# Altium PCB TIDA050024.PcbDoc (part 3 of 3)
Units mil, origin at the board's own origin, x right, y up, seen from the top; angles counter-clockwise.
Board outline 5500.19 x 3301.39 mil, 4 copper layers (Top Layer, Signal Layer 1, Signal Layer 2, Bottom Layer), stack 46.8 mil thick; 150 components, 88 nets, 368 pads, 374 vias.
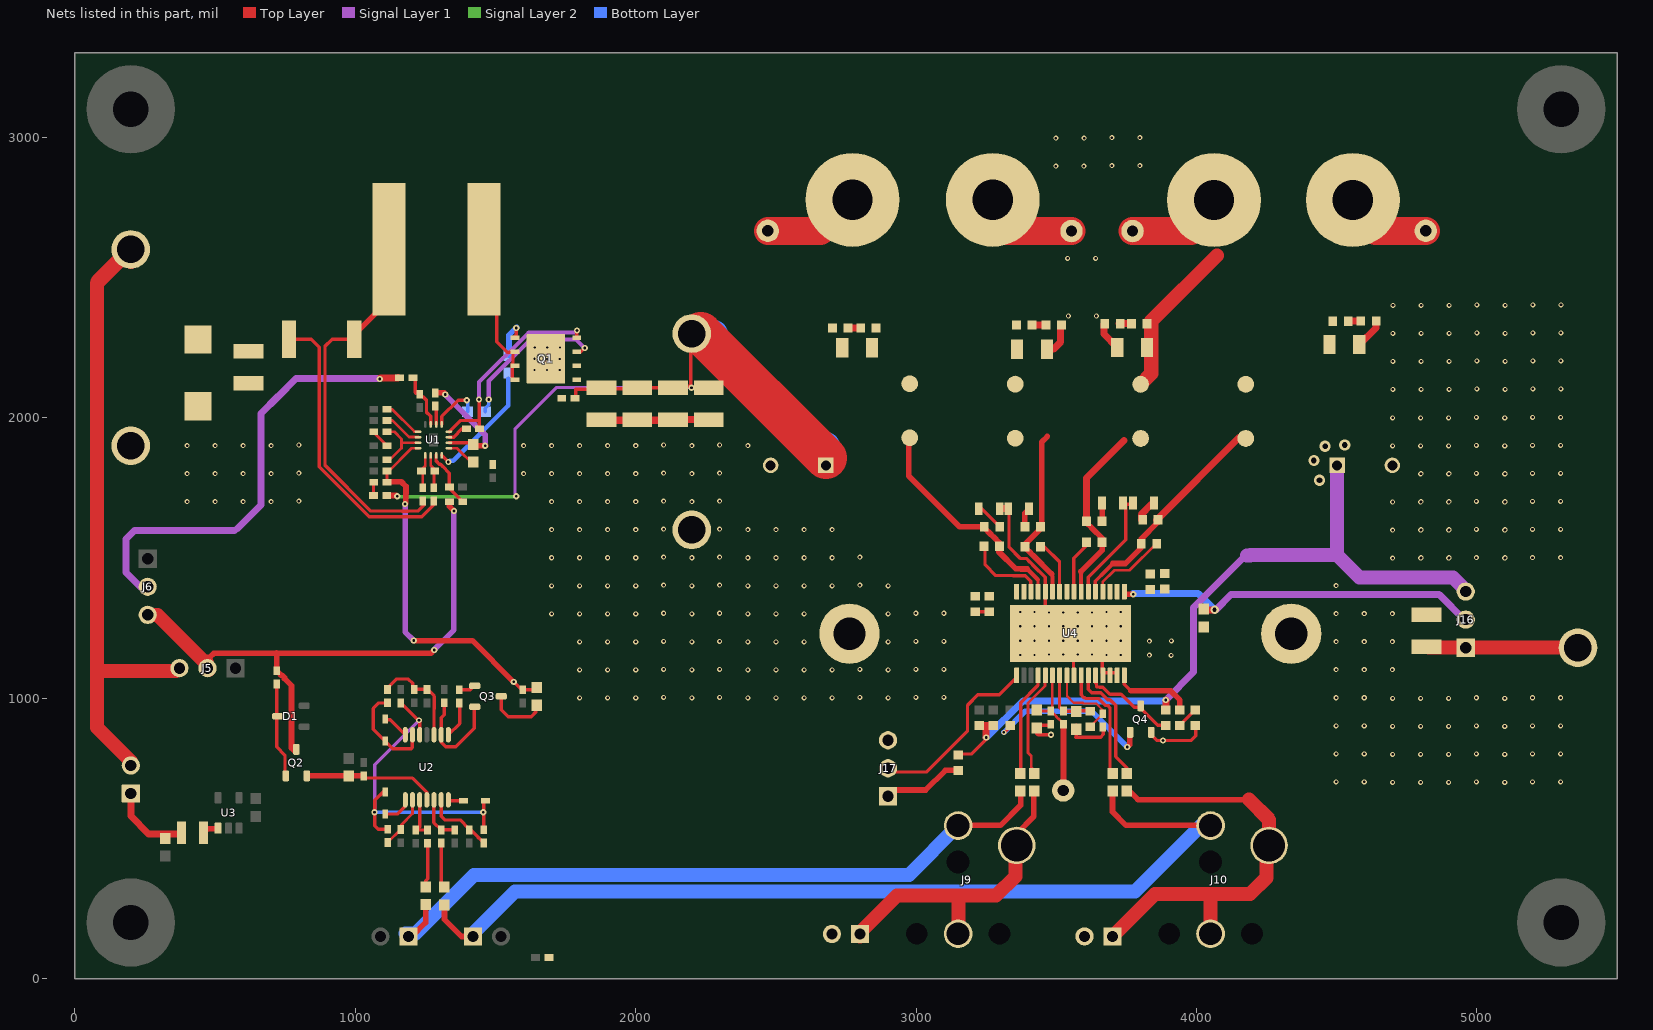
[diagram p4: the nets of this part, all layers, seen from the top]

## Via types
v1: diameter 18, hole 9, Top Layer to Bottom Layer, 291 vias
v2: diameter 22, hole 10, Top Layer to Bottom Layer, 26 vias
v3: diameter 19.68, hole 7.87, Top Layer to Bottom Layer, 18 vias
v4: diameter 19.68, hole 7.87, Top Layer to Bottom Layer, tented both sides, 16 vias
v5: diameter 18, hole 8, Top Layer to Bottom Layer, 9 vias
v6: diameter 40, hole 20, Top Layer to Bottom Layer, 6 vias
v7: diameter 24, hole 12, Top Layer to Bottom Layer, 5 vias
v8: diameter 20, hole 10, Top Layer to Bottom Layer, 2 vias
v9: diameter 30, hole 15, Top Layer to Bottom Layer, 1 vias

## Nets (pads, with @x,y where several pads share a name; then routed paths per layer and width w, separated by ;. In a path a pad name is that pad's centre, name@x,y a point inside that pad or via, vN(x,y) a via of type N, cw(c..) or ccw(c..) an arc to the next point about the centre after c; other vN are vias at no path point) (continued)
AVCC: C27.1 J16.2 U4.17 | length 1342
  Top Layer w20: U4.17@3746.46,1370.11 3746.7,1370.35 v2(3774.52,1370.35)
  Top Layer w25: C27.1@4025.43,1313.59 4062.18,1313.59 4063.67,1315.08 v9@4064.57,1315.08
  Signal Layer 1 w25: v9(4064.43,1315.4) 4069.82,1315.4 4123.57,1369.15 4865.36,1369.15 4955.66,1278.85 J16.2@4963.85,1278.85
  Bottom Layer w25: v2@3774.13,1372.62 3775.37,1373.87 4005.96,1373.87 v9(4064.43,1315.4)
AVCC-IN: C25.1 J15.1 J16.1 | length 531.2
  Top Layer w50: C25.1@4828.07,1180.56 4831.5,1180.56 4832.07,1181.13 4833.2,1180 4970,1180 5351.06,1180 J15.1@5356.39,1185.33
Boot: C16.2 U1.11 | length 62.6
  Top Layer w12: U1.11@1334.28,1930.68 1350.96,1930.68 1380.7,1960.41 C16.2@1384.6,1960.41
COMP: C14.1 R7.2 U1.3 | length 217.5
  Top Layer w10: R7.2@1113.62,1950 1139.75,1950 1165.22,1924.53 1165.22,1911.38 ; C14.1@1120.92,1847.68 1121.19,1847.41 1165.22,1891.44 1165.22,1911.38 ; 1164.75,1911.85 1165.22,1911.38 ; U1.3@1224.04,1911 1165.6,1911 1165.22,1911.38
EN: J6.2 R6.2 | length 1601.5
  Top Layer w25: v2@1089.64,2141.5 1151.98,2141.5 R6.2@1153.44,2142.96
  Signal Layer 1 w25: J6.2@260.09,1397.08 234.18,1397.08 182.73,1448.53 182.73,1567.98 213.05,1598.3 570.48,1598.3 ; 580.33,1604.48 664.53,1688.68 664.53,2015.47 725.79,2076.72 726.36,2076.72 789.26,2139.63 v2@1085.86,2139.63
  other v2: 1087.27,2137.98
EN1: C12.1 R6.1 U1.15 | length 197.2
  Top Layer w12: R6.1@1213.97,2141.18 1213.97,2089.89 1216.54,2087.32 ; 1215.43,2089.25 1226.78,2089.25 1254.24,2061.78 1254.24,2019.88 1269.32,2004.81 U1.15@1269.32,1975.96
FB: C23.1 R2.1 R3.2 R26.2 U1.4 | length 1330.1
  Top Layer w10: R2.1@1113.62,1770 1113.62,1803.53 1201.35,1891.25 U1.4@1226,1891.25
  Top Layer w12: v2(1565.08,1058.19) C23.1@1593.41,1029.87 ; C23.1@1593.42,1029.88 R26.2@1646.87,1029.88
  Top Layer w20: R2.1@1114.7,1771.76 1164.41,1771.76 1181.04,1755.13 1181.04,1731.3 1180.91,1731.17 1180.91,1694.81 v2(1177.92,1691.82) ; v2(1208.81,1205.26) 1418.01,1205.26 v2(1565.08,1058.19)
  Signal Layer 1 w20: v2(1177.92,1691.82) 1177.92,1236.14 v2(1208.81,1205.26)
GND: C1.2 C2.2 C5.2 C6.2 C7.2 C8.2 C9.2 C17.2 C25.2 C27.2 C29.1 C30.1 C32.2 C39.2 C42.1 C43.1 C44.2 C46.2 C51.2 C53.2 C54.2 C55.1 C56.1 H1.1@4337.4,1230 H1.2 J2.1 J4.1 J17.3 JP1.2 JP2.2 Q1.9 Q4.2 R27.1@3480.57,906.95 R28.1 R33.1 R34.1 R35.1 R36.1 R39.1 R40.1 R41.1 R42.1 Rg1.2 Rg2.2 U1.9 U4.9 U4.13 U4.14 U4.15 U4.22 U4.25 U4.28 U4.33@3550.57,1230.57 | length 2518.7
  Top Layer w10: U1.9@1334.28,1891.31 1363.22,1891.31 C17.2@1425.03,1829.5
  Top Layer w12: J2.1@200,1950 J2.1@239.31,1950 ; C7.2@2000.71,1990.96 C7.2@2000.71,1998.84 ; C55.1@3210.57,1308.01 3259.88,1308.01 C56.1@3260.66,1308.79 ; R34.1@3314.8,1677.27 3331.52,1677.27 3331.52,1537.28 3370.58,1498.23 3392.56,1498.23 3406.22,1484.57 3406.35,1484.57 3420.41,1470.51 3420.41,1470.38 3460.18,1430.61 U4.28@3460.18,1389.88 ; U4.33@3460.16,1329.86 U4.28@3460.16,1386.09 ; R27.1@3479.4,903.4 3479.01,903.01 3430.57,903.01 3430.57,873.67 3434.63,869.61 v2(3480.67,869.61) ; U4.33@3481.22,1308.79 3482.72,1308.79 U4.33@3483.49,1309.56 ; U4.33@3536.23,1300.8 U4.33@3536.95,1301.52 ; U4.33@3561.5,1142.57 3561.5,1090.71 U4.9@3563.88,1088.33 ; 3569.63,860.55 3569.95,860.87 ; C43.1@3570.57,903.01 3570.57,861.48 3569.95,860.87 ; U4.22@3616.95,1362.32 3613.72,1362.32 3613.72,1431.43 3747.04,1564.75 R35.1@3747.04,1691.44 ; U4.33@3664.41,1144.48 3664.41,1091.16 3663.9,1090.66 U4.15@3716.08,1090.66 ; R28.1@3667.92,905.02 3667.92,870.86 3657.93,860.87 3569.95,860.87 ; R35.1@3729.76,1692.08 3761.32,1692.08 R36.1@3763.24,1694 ; Q4.2@3838.19,880.03 3838.19,874.94 3835.22,871.97 3857.99,849.2 v2(3880.17,849.2) ; v2(3880.17,849.2) 3980.83,849.24 3996.8,865.21 C46.2@3996.8,900.6 ; C27.2@4021.45,1260.32 C27.2@4024,1257.77
  Top Layer w25: C6.2@1872.99,1988.19 1875.76,1990.96 2000.71,1990.96 2122.16,1990.96 2126.31,1995.11 2128.33,1993.09 C9.2@2260.76,1993.09 ; R33.1@3298.17,1675.9 3298.49,1675.57 R34.1@3328.17,1675.57 ; C32.2@3466.58,2244.29 3489.62,2244.29 3515.78,2270.46 R40.1@3515.78,2327.98 ; R41.1@3673.15,2337.81 3669.93,2334.59 3669.93,2297.86 3717.21,2250.57 C39.2@3717.42,2250.57 ; C44.2@4580.3,2260.95 4639.42,2320.07 R42.1@4639.42,2345.02
  other v1: 4698.97,699.5 4798.97,699.5 4898.97,699.5 5098.97,699.5 4497.99,701.49 4597.99,701.49 4997.99,701.49 5197.99,701.49 5297.99,701.49 4698.97,799.5 4798.97,799.5 4898.97,799.5 5098.97,799.5 4497.99,801.49 4597.99,801.49 4997.99,801.49 5197.99,801.49 5297.99,801.49 4698.97,899.5 4798.97,899.5 4898.97,899.5 5098.97,899.5 4497.99,901.49 4597.99,901.49 4997.99,901.49 5197.99,901.49 5297.99,901.49 4698.97,999.5 4798.97,999.5 4898.97,999.5 5098.97,999.5 1800.45,1000.73 1900.45,1000.73 2000.45,1000.73 2200.45,1000.73 2400.45,1000.73 2500.45,1000.73 2600.45,1000.73 2700.45,1000.73 2900.45,1000.73 4497.99,1001.49 4597.99,1001.49 4997.99,1001.49 5197.99,1001.49 5297.99,1001.49 2099.47,1002.72 2299.47,1002.72 2799.47,1002.72 2999.47,1002.72 3099.47,1002.72 1800.45,1100.73 1900.45,1100.73 2000.45,1100.73 2200.45,1100.73 2400.45,1100.73 2500.45,1100.73 2600.45,1100.73 2700.45,1100.73 2900.45,1100.73 4497.99,1101.49 4597.99,1101.49 4697.99,1101.49 2099.47,1102.72 2299.47,1102.72 2799.47,1102.72 2999.47,1102.72 3099.47,1102.72 3832.05,1153.49 3909.58,1152.56 1800.45,1200.73 1900.45,1200.73 2000.45,1200.73 2200.45,1200.73 2400.45,1200.73 2500.45,1200.73 2600.45,1200.73 2900.45,1200.73 4497.99,1201.49 4597.99,1201.49 4697.99,1201.49 2099.47,1202.72 2299.47,1202.72 2999.47,1202.72 3099.47,1202.72 3831.95,1203.31 3910.53,1204.48 1700.45,1300.73 1800.45,1300.73 1900.45,1300.73 2000.45,1300.73 2200.45,1300.73 2400.45,1300.73 2500.45,1300.73 2600.45,1300.73 2900.45,1300.73 4497.99,1301.49 4597.99,1301.49 4697.99,1301.49 2099.47,1302.72 2299.47,1302.72 2999.47,1302.72 3099.47,1302.72 1700.45,1400.73 1800.45,1400.73 1900.45,1400.73 2000.45,1400.73 2200.45,1400.73 2400.45,1400.73 2500.45,1400.73 2600.45,1400.73 2700.45,1400.73 2900.45,1400.73 4497.99,1401.49 2099.47,1402.72 2299.47,1402.72 2799.47,1402.72 4698.97,1499.5 4798.97,1499.5 4898.97,1499.5 5098.97,1499.5 1700.45,1500.73 1800.45,1500.73 1900.45,1500.73 2000.45,1500.73 2200.45,1500.73 2400.45,1500.73 2500.45,1500.73 2600.45,1500.73 2700.45,1500.73 4800.45,1500.73 4900.45,1500.73 4997.99,1501.49 5100.45,1500.73 5197.99,1501.49 5297.99,1501.49 2099.47,1502.72 2299.47,1502.72 2799.47,1502.72 4698.97,1599.5 4798.97,1599.5 4898.97,1599.5 5098.97,1599.5 1700.45,1600.73 1800.45,1600.73 1900.45,1600.73 2000.45,1600.73 2400.45,1600.73 2500.45,1600.73 2600.45,1600.73 2700.45,1600.73 4800.57,1600.57 4900.57,1600.57 4997.99,1601.49 5100.57,1600.57 5197.99,1601.49 5297.99,1601.49 2099.47,1602.72 2299.47,1602.72 4698.97,1699.5 4798.97,1699.5 4898.97,1699.5 5098.97,1699.5 400.45,1700.73 500.45,1700.73 600.45,1700.73 700.45,1700.73 1700.45,1700.73 1800.45,1700.73 1900.45,1700.73 2000.45,1700.73 2200.45,1700.73 4800.45,1700.73 4900.45,1700.73 4997.99,1701.49 5100.45,1700.73 5197.99,1701.49 5297.99,1701.49 799.47,1702.72 2099.47,1702.72 2299.47,1702.72 4798.97,1799.5 4898.97,1799.5 5098.97,1799.5 400.45,1800.73 500.45,1800.73 600.45,1800.73 700.45,1800.73 1600.45,1800.73 1700.45,1800.73 1800.45,1800.73 1900.45,1800.73 2000.45,1800.73 2200.45,1800.73 4800.57,1800.57 4900.57,1800.57 4997.99,1801.49 5100.57,1800.57 5197.99,1801.49 5297.99,1801.49 799.47,1802.72 2099.47,1802.72 2299.47,1802.72 4698.97,1899.5 4798.97,1899.5 4898.97,1899.5 5098.97,1899.5 400.45,1900.73 500.45,1900.73 600.45,1900.73 700.45,1900.73 1600.45,1900.73 1700.45,1900.73 1800.45,1900.73 1900.45,1900.73 2000.45,1900.73 2200.45,1900.73 2400.45,1900.73 4997.99,1901.49 5197.99,1901.49 5297.99,1901.49 799.47,1902.72 2099.47,1902.72 2299.47,1902.72 4699.09,1999.34 4799.09,1999.34 4899.09,1999.34 5099.09,1999.34 4998.1,2001.33 5198.1,2001.33 5298.1,2001.33 4700.45,2100.73 4800.45,2100.73 4900.45,2100.73 5100.45,2100.73 4999.47,2102.72 5199.47,2102.72 5299.47,2102.72 4700.45,2200.73 4800.45,2200.73 4900.45,2200.73 5100.45,2200.73 4999.47,2202.72 5199.47,2202.72 5299.47,2202.72 4700.45,2300.73 4800.45,2300.73 4900.45,2300.73 5100.45,2300.73 4999.47,2302.72 5199.47,2302.72 5299.47,2302.72 3542.99,2362.72 3642.99,2362.72 4700.57,2400.57 4800.57,2400.57 4900.57,2400.57 5100.57,2400.57 4999.58,2402.56 5199.58,2402.56 5299.58,2402.56 3539.98,2568.29 3639.98,2568.29 3498.67,2897.45 3598.67,2897.45 3698.09,2899.06 3798.09,2899.06 3498.79,2997.3 3598.79,2997.3 3698.21,2998.9 3798.21,2998.9
  other v3: 3473.8,1155.77 3524.98,1155.77 3576.16,1155.77 3627.34,1155.77 3473.8,1204.98 3524.98,1204.98 3576.16,1204.98 3627.34,1204.98 3473.8,1256.16 3524.98,1256.16 3576.16,1256.16 3627.34,1256.16 3473.8,1305.37 3524.98,1305.37 3576.16,1305.37 3627.34,1305.37
  other v4: 3371.44,1153.8 3422.62,1153.8 3678.52,1153.8 3729.71,1153.8 3371.44,1204.98 3422.62,1204.98 3678.52,1204.98 3729.71,1204.98 3371.44,1256.16 3422.62,1256.16 3678.52,1256.16 3729.71,1256.16 3371.44,1307.34 3422.62,1307.34 3678.52,1307.34 3729.71,1307.34
  other v5: 1639.25,2170.19 1684.3,2169.73 1729.3,2169.73 1639.25,2210.19 1684.3,2209.73 1729.3,2209.73 1684.96,2250.16 1729.96,2250.16 1639.91,2250.62
GVDD: C43.2 R43.2 R44.1 U4.7 | length 236.8
  Top Layer w12: U4.7@3511.36,1090.66 3511.36,967.28 3525.23,953.4 3570.03,953.4 3572.28,955.65 R44.1@3618.04,955.65
HDRV: R11.1 U1.13 | length 195.3
  Top Layer w12: U1.13@1308.69,1975.96 1308.69,2004.49 1365.54,2061.34 1376.63,2061.34 ; 1367.02,2062.08 1370.35,2062.08 1370.72,2062.45 v2(1398.07,2062.45)
  Bottom Layer w12: v2@1397.94,2063.83 1400.87,2060.9 R11.1@1400.87,2021.02
HDRV1: Q1.3 R11.2 | length 560.2
  Top Layer w12: Q1.3@1790.04,2235 1804.57,2235 1818.06,2248.49 1818.06,2248.69 v2@1817.68,2249.08
  Signal Layer 1 w12: 1810.08,2256.03 1811.72,2256.03 1811.72,2253.98 v2@1810.49,2252.75
  Signal Layer 1 w15: v2(1476.07,2064.49) 1476.07,2130.41 1625.05,2279.38 1786.72,2279.38 1810.08,2256.03
  Bottom Layer w12: R11.2@1463.86,2021.02 1463.86,2032.96 1476.72,2045.82 v2@1476.72,2064.07 ; v2@1476.21,2064.58 v2@1476.21,2065.34
  other v2: 1818.25,2248.5
ISNS+: C10.2 R01.1 U1.6 | length 125.3
  Top Layer w10: U1.6@1269.32,1865.72 1269.52,1865.52 1269.52,1830.01 1286.72,1812.81 1280.56,1806.65 R01.1@1280.56,1750.22
ISNS-: C10.1 R02.1 U1.5 | length 117.9
  Top Layer w10: C10.1@1233.89,1814.22 1235.56,1814.22 1249.63,1828.29 U1.5@1249.63,1865.72 ; R02.1@1240.56,1750.22 1240.56,1805.72 C10.1@1242.94,1808.1
LDRV: R10.1 U1.8 | length 426
  Top Layer w12: U1.8@1308.69,1865.72 v2(1332.15,1842.26)
  Bottom Layer w12: v2(1332.15,1842.26) v2@1336.83,1846.95
  Bottom Layer w16: v2@1336.83,1846.95 1349.18,1846.95 1545.59,2043.36 1545.59,2139.47
LDRV1: Q1.5 R10.2 | length 149.2
  Top Layer w12: Q1.5@1566.26,2287.66 1574.77,2296.17 v2@1574.77,2321.63
  Bottom Layer w12: v2@1574.27,2318.94 v2(1574.27,2320.37)
  Bottom Layer w20: R10.2@1548.42,2222.91 1548.42,2294.52 v2@1575.81,2321.9
LIN: C21.1 C38.1 J8.1 J10.3 | length 3442.1
  Top Layer w20: C21.1@1318.41,261.7 1318.41,211.28 1379.68,150 J8.1@1420,150 J8.1@1410.01,159.99 ; C38.1@3700.49,668.52 3700.49,594.85 3748.94,546.4 J10.3@4050.57,546.4
  Bottom Layer w25: J8.1@1411.17,151.17 J8.1@1414.32,148.02
  Bottom Layer w50: J8.1@1411.17,151.17 1570,310 3780,310 4015.83,545.83 J10.3@4050,545.83
LINN: C41.2 U4.11 | length 431.7
  Top Layer w12: U4.11@3614.55,1080.97 3614.55,1030.95 3626.62,1018.88 3658.01,1018.88 3682.95,993.94 3691.47,993.94 3711.38,974.03 3711.38,934.11 3711.49,934 3711.49,791.8 3751.83,751.45 3748.25,747.87 C41.2@3748.25,731
LINP: C38.2 U4.10 | length 430.8
  Top Layer w12: U4.10@3588.96,1080.97 3588.96,1011.49 3598.7,1001.75 3601.7,1001.75 3604.57,998.88 3649.73,998.88 3674.67,973.94 3683.18,973.94 3691.38,965.74 3691.38,909.07 3691.49,908.96 C38.2@3691.49,725.88
MODSEL: J17.2 U4.1 | length 680
  Top Layer w12: J17.2@2900,750 2913.44,736.56 3036.8,736.56 3183.56,883.33 3183.56,975.73 ; 3183.65,975.64 3220.34,1012.34 3297.05,1012.34 3357.95,1073.24 3357.49,1073.7 U4.1@3357.49,1096.02
MUTE: Q4.3 R30.2 U4.12 | length 355.4
  Top Layer w12: U4.12@3640.14,1080.97 3640.14,1053.41 3643.37,1050.17 3643.37,1039.91 3653.64,1039.91 3654.67,1038.88 3666.3,1038.88 3691.24,1013.94 3730.91,1013.94 3777.6,967.26 Q4.3@3800.42,967.26 ; Q4.3@3800.42,970.84 Q4.3@3800.42,967.26 ; R30.2@3890.57,901.29 R30.2@3894,901.29 ; R30.2@3890.57,903.01 3861.12,903.01 3852.12,912.01 3852.07,912.01 3800.42,963.67 Q4.3@3800.42,967.26
NetC11_1: C11.1 R5.1 U1.7 | length 261.4
  Top Layer w10: U1.7@1288.7,1867.06 1288.7,1847.24 1302.13,1833.81 1303.13,1832.81 1303.93,1832.81 1310.37,1826.37
  Top Layer w12: U1.7@1288.11,1867.43 1288.11,1845.93 1300.23,1833.81 1302.13,1833.81 1304.34,1833.81 1311.37,1826.78 1311.37,1826.47 1335.72,1802.12 C11.1@1335.72,1752.85 ; C11.1@1335.94,1754.83 1335.94,1747.69 R5.1@1383.62,1700
NetC13_1: C13.1 R7.1 | length 70.2
  Top Layer w10: R7.1@1066.51,1949.49 1067.83,1948.17 1069.81,1948.17 1069.81,1943.81 C13.1@1113.62,1900
NetC15_1: C15.1 U1.2 | length 136.8
  Top Layer w10: C15.1@1113.62,1990 1132.52,1990 1191.47,1931.05 1224.65,1931.05 1225.37,1930.32 U1.2@1225.62,1930.57
NetC20_2: C20.2 R13.2 | length 161.4
  Top Layer w12: C20.2@1251.93,326.52 1251.93,348.52 1258.99,355.59 1258.99,484.51 R13.2@1259.3,484.82
NetC21_2: C21.2 R19.2 | length 160.5
  Top Layer w12: R19.2@1305.43,481.76 1305.43,481.15 1306.35,480.24 1306.35,337.11 C21.2@1317.29,326.17
NetC22_1: C22.1 R23.2 R24.2 U2.10 | length 359.8
  Top Layer w12: R23.2@1114.15,1034.64 1114.15,1035.59 1146.67,1068.11 1190.03,1068.11 1204.69,1053.45 1204.69,1031.13 1205.65,1032.09 1257.93,1032.09 1281.08,1008.94 1281.08,1006.39 1281.93,1005.54 1281.93,961.6 1281.08,960.75 U2.10@1281.08,869.61
NetC31_1: C31.1 J9.1 J9.4 JP1.1 | length 1121.1
  Top Layer w20: J9.4@3359.23,475.53 3359.23,517.63 3419.49,577.89 C31.1@3419.49,669.85
  Top Layer w50: JP1.1@2800.57,150.57 2800.57,164.61 2931.53,295.57 3285.07,295.57 3353.89,364.4 J9.4@3353.89,479.69 ; 3146.53,295.33 3150.57,291.29 J9.1@3150.57,160.57
NetC33_2: C33.2 R40.2 | length 47.8
  Top Layer w25: C33.2@3413.13,2330.57 3460.85,2330.57 R40.2@3460.92,2330.64
NetC34_2: C34.2 U4.26 | length 187
  Top Layer w12: C34.2@3443.13,1540.57 3456.95,1540.57 3511.36,1486.16 U4.26@3511.36,1389.88
NetC35_2: C35.2 U4.30 | length 281.5
  Top Layer w12: C35.2@3245.86,1542.3 3245.86,1475.55 3284.14,1437.27 3345.37,1437.27 3345.65,1436.99 3365.21,1436.99 3365.63,1436.57 3389.86,1436.57 3409,1417.44 U4.30@3409,1389.88
NetC36_2: C36.2 U4.24 | length 185.8
  Top Layer w12: U4.24@3562.54,1389.88 3562.54,1459.24 3562.37,1459.4 3562.37,1499.53 3605.21,1542.36 C36.2@3605.21,1557.89
NetC37_2: C37.2 U4.20 | length 274.1
  Top Layer w10: U4.20@3665.36,1389.48 3665.36,1413.65 3707.89,1456.18 3761.19,1456.18 3762.7,1457.69 3762.97,1457.69 3857.15,1551.87 C37.2@3857.15,1552.76
NetC40_2: C40.2 R41.2 | length 49.5
  Top Layer w25: R41.2@3727.93,2336.52 3723.42,2336.52 3724.37,2335.57 R41.2@3728.13,2335.57 C40.2@3768.01,2335.57
NetC41_1: C41.1 J10.1 J10.4 JP2.1 | length 1538.2
  Top Layer w20: C41.1@3755.91,673.42 3791.13,638.2 4187.38,638.2
  Top Layer w50: JP2.1@3700.57,150.57 3851.2,301.2 4190.98,301.2 4249.39,359.61 J10.4@4249.39,488.22 ; J10.1@4050.57,160.57 4050.57,293.35 4052.63,295.41 ; 4187.38,638.2 4259.23,566.35 J10.4@4259.23,475.53
NetC45_2: C45.2 R42.2 | length 44.2
  Top Layer w25: C45.2@4541.03,2344.34 4584.26,2344.34 R42.2@4584.93,2345.02
NetC46_1: C46.1 R29.1 | length 76.3
  Top Layer w12: R29.1@3942.14,903.96 3942.14,904.7 C46.1@3995.57,958.13
NetC47_1: C47.1 R33.2 | length 102.7
  Top Layer w12: R33.2@3223.66,1678.7 3230.01,1678.7 C47.1@3298.13,1610.57
NetC48_1: C48.1 R34.2 | length 71
  Top Layer w20: C48.1@3388.01,1610.57 3388.01,1659.51 R34.2@3403.61,1675.1
NetC49_1: C49.1 R35.2 | length 66.1
  Top Layer w20: R35.2@3660.02,1695.43 3663.13,1692.31 C49.1@3663.13,1630.57
NetC50_1: C50.1 R36.2 | length 68.8
  Top Layer w25: C50.1@3803.01,1635.57 3803.01,1655.16 R36.2@3837.83,1689.97
NetC52_2: C52.2 R39.2 | length 46.7
  Top Layer w25: R39.2@2757.56,2320 2802.13,2320 2803.32,2321.19 2803.12,2321.39 C52.2@2803.12,2321.59
NetD1_3: D1.3 Q2.1 R17.1 | length 348.7
  Top Layer w12: R17.1@720.03,1050.4 720.03,937.84 720.39,937.48 720.39,826.16 749.47,797.07 Q2.1@749.47,713.87
NetD2_1: D2.1 D4.1 R16.2 R18.2 R22.2 U2.12 | length 1208.3
  Top Layer w12: D2.1@1104.49,670.14 1069.77,635.42 1069.77,544.38 1081.81,532.34 R16.2@1115.71,532.34 ; R18.2@1162.44,983.15 v8@1226.16,919.43 ; U2.12@1230.24,869.33 v8@1230.24,915.35 ; v2(1456.37,593.34) v2@1458.79,590.91 ; R22.2@1459.04,531.05 v2@1459.04,590.91 ; v2@1459.04,593.34 1459.04,630.34 D4.1@1462.99,634.29
  Signal Layer 1 w12: v2(1069.32,593.34) 1069.32,761.99 v8@1226.53,919.2
  Bottom Layer w12: v2@1072.12,593.34 v2(1456.37,593.34)
  other v8: 1227.66,920.94
NetD2_2: D2.2 U2.1 | length 108.4
  Top Layer w12: D2.2@1106.87,586.89 1150.42,586.89 1178.78,615.25 1178.78,638.97 1179.31,638.44 U2.1@1179.31,638.18
NetD3_1: D3.1 R23.1 U2.13 | length 348
  Top Layer w12: R23.1@1113.43,982.94 1084.44,982.94 1064.74,963.23 1064.74,889.02 D3.1@1106.87,846.89 1134,819.76 1199.27,819.76 1203.42,823.9 U2.13@1203.42,871.73
NetD3_2: D3.2 U2.14 | length 96
  Top Layer w12: D3.2@1104.95,923.21 1125.12,923.21 U2.14@1178.72,869.61
NetD4_2: D4.2 U2.7 | length 58.2
  Top Layer w12: U2.7@1331.99,634.58 1332.26,634.86 U2.7@1332.26,637.33 1335.77,633.82 D4.2@1386.12,633.82
NetJ17_1: J17.1 R38.1 | length 281.6
  Top Layer w20: J17.1@2900,650 2922.49,672.49 3034.18,672.49 3104.33,742.64 R38.1@3143.23,742.64
NetL1_1: L1.1 R0.2 R02.2 | length 1342.4
  Top Layer w12: R0.2@981.14,2280 917.69,2280 892.31,2254.62 892.31,1830 1055.14,1667.17 1167.22,1667.17 1167.57,1666.82 1188.28,1666.82 1188.63,1667.17 1223.63,1667.17 1246.22,1689.77 1246.22,1692.61 R02.2@1239.46,1699.37
  Top Layer w20: R0.2@981.14,2280 1118.96,2417.81 L1.1@1118.96,2597.97
NetL2_2: L2.2 U3.1 | length 56.6
  Top Layer w20: L2.2@459.37,520 473.12,533.75 U3.1@510.32,533.75
NetQ3_1: Q3.1 R27.1@1371.04,1030.14 | length 58.4
  Top Layer w12: R27.1@1371.04,1030.14 1409.97,1030.14 Q3.1@1423.7,1043.87
NetQ3_2: Q3.2 R25.2 U2.9 | length 382.7
  Top Layer w12: U2.9@1306.67,869.61 1306.67,930.62 1317.22,941.17 R25.2@1317.22,980.21 ; U2.9@1306.71,867.14 1306.71,842.6 1322.09,827.22 1358.43,827.22 1371.11,839.9 1371.46,839.9 1424.48,892.92 Q3.2@1424.48,967.27 ; U2.9@1307.37,845.22 U2.9@1307.37,862.72
NetQ3_3: Q3.3 R26.1 | length 221.3
  Top Layer w12: Q3.3@1520.79,1006.62 1520.79,958.61 1545.46,933.94 1627.17,933.94 1644.7,951.47 R26.1@1644.7,983.38
NetQ4_1: Q4.1 R37.2 | length 619.8
  Top Layer w12: v1@3312.77,876.48 3314.04,876.48 R37.2@3340.57,903.01
  Top Layer w20: v2(3753.07,825.8) 3761.24,833.96 Q4.1@3761.24,879.17
  Bottom Layer w20: v1(3313.33,877.83) 3389.32,953.81 3625.06,953.81 v2(3753.07,825.8)
NetR1_1: R1.1 R2.2 | length 45.9
  Top Layer w10: R1.1@1065.39,1722.61 1065.39,1767.33 R2.2@1066.21,1768.15
NetR8_2: R8.2 U1.1 | length 144.7
  Top Layer w10: R8.2@1113.62,2030 1131.62,2030 1211.37,1950.25 U1.1@1225.3,1950.25
NetR13_1: R13.1 R14.2 U2.3 | length 161.3
  Top Layer w12: R14.2@1212.19,529.3 1212.83,529.94 R14.2@1215.81,529.94 R14.2@1219.16,529.94 ; R14.2@1218.52,529.3 R14.2@1219.16,529.94 ; U2.3@1229.42,638.83 1229.42,638.4 U2.3@1230.95,636.87 ; U2.3@1229.9,637.33 1229.9,540.68 R14.2@1219.16,529.94 ; R13.1@1257.9,529.94 R14.2@1219.16,529.94
NetR15_2: R15.2 R16.1 U2.2 | length 186.4
  Top Layer w10: R16.1@1115.71,485.1 1163.14,532.53 1164.03,532.53 1164.03,548.34 1203.82,588.12 U2.2@1203.82,634.5
NetR19_1: R19.1 R20.2 U2.5 | length 162.9
  Top Layer w12: U2.5@1280.55,633.89 1280.55,556.52 1306.62,530.44 R20.2@1355.33,530.44
NetR21_2: R21.2 R22.1 U2.6 | length 248.8
  Top Layer w12: U2.6@1306.74,635.83 1306.74,578.76 1319.82,565.69 1374.65,565.69 1405.58,534.77 1408.08,534.77 1433.23,509.62 1433.23,509.51 1441.43,501.31 1441.54,501.31 R22.1@1459.04,483.81
NetR27_2: R27.2@1371.04,982.89 U2.8 | length 126.5
  Top Layer w12: U2.8@1332.26,869.61 1372.23,909.58 R27.2@1372.23,979.55
NetR28_2: R28.2 R44.2 U4.8 | length 302.1
  Top Layer w8: U4.8@3537.78,1080.97 3537.78,1007.4 3561.43,983.75 3594.24,983.75 3597.12,980.88 3642.27,980.88 3664.12,959.04 3664.12,941.95 3619.06,896.9 R44.2@3617.66,896.9
NetR29_2: R29.2 U4.16 | length 301.6
  Top Layer w12: U4.16@3742.79,1094.7 3742.79,1049.55 3766.15,1026.2
  Top Layer w20: 3766.15,1026.2 3907.94,1026.2 3940.57,993.57 R29.2@3940.57,958.13
OUTL+: C39.1 C40.1 J13.1 L21.2 TP5.1 | length 961.6
  Top Layer w50: L21.2@3800.57,2119 3838.5,2156.93 3838.5,2344.56 4072.5,2578.56 ; J13.1@4069.38,2684.29 J13.1@4069.38,2751.28
  Top Layer w100: TP5.1@3771.82,2665.65 3980.4,2665.65 J13.1@4060.88,2746.13
OUTL-: C44.1 C45.1 J14.1 L22.2 TP7.1 | length 456.6
  Top Layer w50: J14.1@4465.95,2689.8 4542.61,2766.47 J14.1@4573.89,2766.47
  Top Layer w100: J14.1@4543.56,2764.98 4543.56,2761.36 4638.62,2666.3 TP7.1@4817.44,2666.3
OUTNL: C37.1 C50.2 L22.1 U4.21 | length 794.7
  Top Layer w12: U4.21@3639.31,1389.88 3639.31,1417.44 3661.4,1439.52
  Top Layer w15: 3661.4,1439.52 3701.88,1480
  Top Layer w20: 3701.88,1480 3746.51,1480 3801.52,1535.01 C37.1@3801.52,1553.2 ; C37.1@3803.01,1550.57 3803.01,1567.73 3862.83,1627.55 C50.2@3862.83,1633.44 ; C50.2@3858.13,1631.32 C50.2@3858.13,1635.57
  Top Layer w25: C50.2@3858.13,1635.57 4151.98,1929.42 L22.1@4162.59,1929.42
OUTNR: C34.1 C48.2 L12.1 U4.27 | length 608.2
  Top Layer w12: C34.1@3390.3,1535.86 C34.1@3390.3,1539.44 ; 3483.29,1437.29 3485.77,1434.81
  Top Layer w15: U4.27@3486.1,1389.8 3486.1,1434.74
  Top Layer w20: C34.1@3388.01,1540.57 3388.01,1548.69 C48.2@3446.81,1607.48 ; C34.1@3390.3,1535.86 3409.38,1516.78 3409.38,1516.38 3419.93,1505.84 3420.32,1505.84 3483.29,1442.87 ; C48.2@3443.13,1610.57 3448.09,1615.53 3448.09,1913.47 3468.07,1933.44
OUTPL: C36.1 C49.2 L21.1 U4.23 | length 639.4
  Top Layer w15: U4.23@3587.87,1384.8 3587.87,1451.84
  Top Layer w20: 3587.87,1451.84 3663.13,1527.1 C36.1@3663.13,1555.57 3663.13,1570.61 3629.66,1604.07 ; C49.2@3608.01,1630.57 3608.01,1624.99 3626.62,1606.38
  Top Layer w25: C49.2@3608.01,1630.57 3608.01,1785.49 3741.17,1918.64
OUTPR: C35.1 C47.2 L11.1 U4.29 | length 813.8
  Top Layer w12: 3384.57,1460.99 3388.05,1457.51 ; U4.29@3433.22,1391.24 3434.59,1389.88 3434.59,1422.4
  Top Layer w15: 3396.41,1460.57 3434.59,1422.4
  Top Layer w20: L11.1@2973.81,1916.21 2973.81,1792.34 3155.58,1610.57 C47.2@3243.01,1610.57 3243.01,1607.79 C47.2@3245.45,1605.35 ; C47.2@3244.64,1605.35 C47.2@3245.45,1605.35 ; C47.2@3246.81,1605.35 C47.2@3245.45,1605.35 ; C35.1@3295.58,1544.15 3294.66,1543.23 3294.66,1521.93 3355.6,1460.99 3384.57,1460.99 ; C35.1@3297.79,1542.04 3297.79,1553.21 3275.16,1575.84 3274.93,1575.84 3264.38,1586.38 C47.2@3245.45,1605.35 ; 3375.57,1460.57 3396.41,1460.57
OUTR+: C51.1 C52.1 J11.1 L11.2 TP2.1 | length 347.7
  Top Layer w100: TP2.1@2471.45,2666.3 2659.06,2666.3 2769.65,2776.89 J11.1@2773.39,2776.89
OUTR-: C32.1 C33.1 J12.1 L12.2 TP3.1 | length 364.4
  Top Layer w100: J12.1@3262.43,2748.59 3262.43,2682.94 3279.73,2665.65 3350.35,2665.65 TP3.1@3554.07,2665.65
PGOOD: R9.2 U1.14 | length 49.9
  Top Layer w12: U1.14@1289,1975.96 R9.2@1289,2025.82
PLIMIT: C42.2 R27.2@3480.57,954.19 R43.1 TP6.1 U4.6 | length 499
  Top Layer w10: C42.2@3430.57,958.13 3428.56,956.12 3428.56,955.33 3429.7,954.19 R27.2@3480.57,954.19 ; U4.6@3485.77,1090.66 3485.77,955.18 3483.02,952.43 3500.76,934.69 3500.76,932.7 3508.02,925.45 3510.01,925.45 3525.88,909.57 R43.1@3525.88,907.32
  Top Layer w23: TP6.1@3525.57,668.47 R43.1@3525.57,906.95
  Top Layer w25: TP6.1@3524.86,667.76 TP6.1@3525.57,668.47
PVCC: C5.1 C6.1 C7.1 C8.1 C9.1 C29.2 C30.2 C53.1 C54.1 C55.2 C56.2 J3.1 J16.3 Q1.1 Q1.2 R1.2 R30.1 R31.2 R32.1 R38.2 U4.18 U4.19 U4.31 U4.32 | length 5582
  Top Layer w12: C5.1@1784.48,2069.03 1786.34,2070.89 1786.34,2101.32 1877.53,2101.32 1879.58,2103.38 2002.86,2103.38 2004.04,2102.2 C7.1@2008.88,2107.05 ; C7.1@2005.85,2107.05 C7.1@2008.88,2107.05 ; 2069.91,2107.24 2009.07,2107.24 C7.1@2008.88,2107.05 ; J3.1@2198.98,2294.8 2196.9,2292.73 2196.9,2112.01 2133.73,2112.01 2128.77,2107.05 C7.1@2008.88,2107.05 ; R38.2@3142.24,800.95 3198.17,800.95 3250.1,852.89 v2(3250.1,859.29)
  Top Layer w20: R1.2@1112.63,1722.61 v2@1146.76,1722.61
  Top Layer w25: R31.2@3231.37,904.23 3232.59,903.01 R32.1@3275.57,903.01 ; 3249.8,897.77 3249.8,859.59 v2(3250.1,859.29) ; v2(3890.5,993.96) 3890.5,962.55 R30.1@3891.16,961.9
  Top Layer w100: J3.1@2198.3,2302.64 J3.1@2232.25,2302.64
  Top Layer w150: J3.1@2232.25,2302.64 C53.1@2678.43,1856.46
  Signal Layer 1 w12: v2(1574.25,1719.67) 1570,1723.92 1570,1961.44 1716.1,2107.54 v2@2196.56,2107.54
  Signal Layer 1 w25: v2(3890.5,993.96) 3989.56,1093.01 3989.56,1323.75 4171.47,1505.67 4179.83,1505.67
  Signal Layer 1 w50: 4180.43,1508.03 4190.38,1508.03 4192.17,1509.83 4501.57,1509.83 ; C54.1@4501.57,1830 4501.57,1509.83 ; J16.3@4958.56,1385.17 4914.08,1429.64 4581.77,1429.64 4501.57,1509.83
  Signal Layer 2 w12: v2@1149.21,1721.63 1152.47,1718.38 1572.96,1718.38 v2(1574.25,1719.67)
  Bottom Layer w25: v2@3249.38,860.02 v2(3250.1,859.29) 3380.61,989.8 3886.92,989.8 v2@3891.33,994.21
  Bottom Layer w100: J3.1@2197.2,2299 2279.28,2299 ; 2678.43,1890.08 2678.43,1899.86
  other v2: 1150,1720 2198.87,2106.87
  other v6: 4438.45,1777.29 4418.45,1847.29 4458.37,1898.28 4528.68,1902.89
RIN: C20.1 C26.1 J7.1 J9.3 | length 2579.5
  Top Layer w20: J7.1@1190,150 1201.82,150 1251.31,199.49 C20.1@1251.31,262.52 ; J9.3@3150.57,546.4 3300.98,546.4 3372.81,618.23 3372.81,666.58 C26.1@3369.54,669.85
  Bottom Layer w50: J7.1@1179.52,161.35 1214.75,161.35 1423.4,370 2974.17,370 J9.3@3150,545.83
RINN: C31.2 U4.5 | length 383.1
  Top Layer w10: C31.2@3420.57,742.07 3410.87,751.77 3410.87,793.2 3398.7,805.37 3398.7,866.49 3398.87,866.66 3398.87,982.14 3460.18,1043.44 U4.5@3460.18,1090.66
RINP: C26.2 U4.4 | length 371
  Top Layer w12: C26.2@3372.27,747.01 3372.87,747.61 3372.87,775.31 3372.57,775.61 3372.57,983.18 3434.59,1045.19 U4.4@3434.59,1090.66 ; C26.2@3372.82,747.56 C26.2@3372.82,748.85
SW: L1.2 Q1.6 Q1.7 Q1.8 | length 519.9
  Top Layer w12: L1.2@1459.29,2600 1505.3,2554 1505.3,2270.24 1541.77,2233.76 1562.25,2233.76 1562.82,2234.33 1562.82,2194.87 1560.53,2192.58 1560.53,2141.67 1563.39,2138.81 Q1.8@1563.39,2138.24
SW1: C16.1 Q1.4 U1.12 | length 794.8
  Top Layer w12: U1.12@1334.28,1950.37 1335.86,1950.37 1375.7,1990.2 1439.91,1990.2 1440.22,1989.9 ; C16.1@1441.72,1970.06 1441.72,2037.75 ; C16.1@1441.97,1962.8 v2(1441.97,2065.45) ; v2@1789.72,2309.63 1790.04,2309.31 Q1.4@1790.04,2285
  Signal Layer 1 w15: v2(1441.97,2065.45) 1441.97,2126.94 1619.13,2304.1 1782.81,2304.1 v2@1783.85,2305.14
  other v2: 1790.5,2310.8
V+: C18.1 C19.1 Q2.2 U2.4 | length 468.1
  Top Layer w12: C19.1@1038.96,715.23 1204.58,715.23 1254.95,664.86 U2.4@1254.95,638.67 ; U2.4@1255.35,637.7 U2.4@1256.97,637.7
  Top Layer w20: Q2.2@827.4,722.76 980.94,722.76 981.97,723.79 C19.1@1030.4,723.79
VCC: C17.1 R9.1 U1.10 | length 618.6
  Top Layer w12: U1.10@1334.28,1911 1423.43,1911 C17.1@1434.59,1899.84
  Top Layer w20: R9.1@1285,2088.62 1316.97,2088.62 v2@1320.06,2085.53 ; C17.1@1434.59,1899.84 1464.19,1899.84 1464.33,1899.69 v2@1464.77,1899.69
  Signal Layer 1 w12: v2@1319.67,2082.98 1320.02,2082.64 1320.67,2082.64 v2(1321.4,2082.64)
  Signal Layer 1 w20: v2@1319.67,2082.98 1319.83,2082.98 1463.41,1939.4 1463.41,1939.9 1320.67,2082.64 v2@1319.89,2083.43 ; v2(1463.41,1899.79) 1463.41,1938.28
VIN: C1.1 C2.1 J1.1 J5.3 JP3.2 R0.1 R01.2 | length 3496.9
  Top Layer w12: R0.1@748.86,2280 843.28,2280 871.24,2252.04 871.24,1825.62 1049.67,1647.18 1236.83,1647.18 R01.2@1281.37,1691.72 ; R01.2@1280.24,1699.26 R01.2@1280.61,1698.89
  Top Layer w20: 85.61,868.74 86.96,867.38 ; JP3.2@200,750 JP3.2@200,752.09
  Top Layer w50: 78.74,1108.44 78.74,2478.74 ; J1.1@197.49,2605.8 197.49,2603.57 80.45,2486.53 80.45,2480.45 J1.1@200,2600 J1.1@200,2555.66 ; JP3.2@201.1,774.68 80.03,895.76 79.17,895.76 79.17,1097.47 361.86,1097.47 J5.3@372.83,1108.44
Vin_ctrl: J5.2 J6.3 Q2.3 R5.2 R17.2 | length 2126.7
  Top Layer w20: J5.2@473.18,1106.94 473.18,1146.53 482.27,1146.53 495.91,1160.16 720.03,1160.16 ; 719.32,1161.09 720.03,1160.38 720.03,1160.16 ; Q2.3@783.21,812.04 773.06,822.2 773.06,1044.62 747.84,1069.83 747.84,1072.78 738.47,1082.15 735.52,1082.15 R17.2@720.03,1097.64 720.03,1160.16 ; v2(1281.68,1171.4) 1270.44,1160.16 720.03,1160.16 ; R5.2@1336.21,1696.98 1336.21,1683.8 v2(1352.47,1667.53)
  Top Layer w50: J6.3@260.09,1297.08 295.2,1297.08 404.18,1188.09 J5.2@470.39,1121.88 ; J5.2@470.39,1128.73 J5.2@470.39,1121.88 ; J5.2@471.21,1109.28 471.21,1121.06 J5.2@470.39,1121.88 ; J5.2@476.29,1099.89 470.39,1105.78 J5.2@470.39,1121.88
  Signal Layer 1 w20: v2(1281.68,1171.4) 1281.68,1172.78 1351.91,1243.01 v2@1351.91,1670.16
"Vin_one cell": C3.1 JP3.1 L2.1 | length 293.8
  Top Layer w25: JP3.1@200,670 200,579.15 263.42,515.72 374.17,515.72 L2.1@375.93,517.48
pads on no net: D1.2 H1.1@200,3100 H2.1 H3.1 H4.1 J9.M1 J9.M2 J9.M3 J10.M1 J10.M2 J10.M3 U4.33@3550.57,1230.57

## Polygon pours and split planes (outlines as drawn)
PVCC on Top Layer "Top Layer-No Net 7" (solid, remove dead copper, pour order 18): 2707.36,1945.27 3229.27,1423.79 3377.35,1423.79 3390.57,1410.57 3390.57,1366.57 3384.57,1360.57 3110.57,1360.57 3052.48,1360.57 2851.23,1561.82 2587.57,1825.48
PVCC on Top Layer "PVCC_L01_P088" (solid, remove dead copper, pour order 88): 3724.16,1354 3724.54,1409.53 3733.37,1418.37 3773.08,1418.24 3781.57,1426.73 4198.82,1426.73 4198.82,1427.41 4593.47,1822.06 4593.47,1888 4518.55,1962.91 4403.61,1962.91 4113.37,1672.67 4030.75,1672.67 3878.7,1520.63 3847.63,1520.56 3771.97,1445.2 3769.42,1442.57 3716.72,1442.68 3683,1408.96 3683,1354
OUTNR on Top Layer "Top Layer-No Net 10" (solid, remove dead copper, pour order 24): 3190.57,1990.57 3515.57,1990.57 3515.57,1595.57 3425.57,1595.57 3425.57,1630.57 3435.57,1640.57 3435.57,1660.57 3435.57,1690.57 3320.57,1805.57 3190.57,1805.57
OUTPR on Top Layer "Top Layer-No Net 9" (solid, pour order 22): 2815.71,1990.24 2816.04,1990.57 3140.57,1990.57 3140.57,1670.57 3175.57,1635.57 3180.57,1630.57 3240.57,1630.57 3255.57,1630.57 3260.57,1625.57 3260.57,1590.57 3255.59,1585.59 3150.48,1585.59 3100.59,1585.59 3100.57,1585.57 3095.57,1585.57 2815.57,1865.57 2815.72,1865.72 2815.72,1990.24 2815.72,1990.26 2816.03,1990.56
OUTNR on Top Layer "Top Layer-No Net 20" (solid, remove dead copper, pour order 50): 3403.15,1543.23 3403.15,1536.81 3426.57,1513.38 3434.38,1505.58 3462.92,1505.58 3494.67,1473.82 3494.67,1391.5 3478.62,1391.5 3478.19,1391.94 3478.19,1433.14 3387.76,1524.01 3373.66,1523.79 3373.66,1542.88 3374.09,1543.31
OUTPR on Top Layer "Top Layer-No Net 19" (solid, remove dead copper, pour order 48): 3313.6,1530.53 3313.63,1523.11 3313.63,1520.57 3321.18,1513.02 3361.24,1472.96 3397.99,1472.96 3443.73,1427.26 3443.73,1388.38 3426.99,1388.38 3426.84,1415.78 3426.84,1418.45 3394.7,1450.59 3309.9,1450.59 3282.12,1478.15 3282.12,1530.13 3313.2,1530.13
GND on Top Layer "GND_L01_P086" (solid, remove dead copper, pour order 86): 910,2160 930,2140 930,1790 950,1770 1010,1770 1030,1750 1030,1660 1050,1640 1388.99,1640 1388.99,1836.26 1480,1927.27 1480,2070 1510,2100 1590,2100 1610,2120 1610,2400 1750,2400 1750,2050 1760,2040 2338.27,2040 2798.27,1580 2800,1580 2800,50 1700,50 1700,1050 1650,1100 1580,1100 1450,1230 138.09,1230 138.09,2160
AGND on Top Layer "AGND_L01_P082" (solid, remove dead copper, pour order 82): 740,50 1640.91,50 1640.91,1139.14 740,1139.14
AGND on Top Layer "AGND_L01_P112" (solid, remove dead copper, pour order 112): 1376.75,1765.24 1391.48,1765.17 1428.4,1802.09 1540,1802.09 1540,1735.81 1389.47,1735.81 1376.73,1748.55
OUTR+ on Top Layer "Top Layer-No Net 13" (solid, remove dead copper, pour order 30): 2815.57,2055.57 2815.57,2180.57 2821.93,2186.93 2821.9,2261.9 2830.23,2270.23 2830.23,2425.91 2810.57,2445.57 2645.09,2611.06 2645.09,2763.15 2878,2763.15 2940.87,2700.29 2940.57,2525.57 2940.57,2320.57 3050.57,2210.57 3135.57,2125.57 3135.57,2055.57
OUTR- on Top Layer "Top Layer-No Net 14" (solid, remove dead copper, pour order 32): 3190.57,2055.57 3190.57,2487.29 3120.57,2557.29 3119.19,2555.9 3120.57,2557.29 3120.57,2730.57 3205.57,2815.57 3360.57,2815.57 3362.24,2815.57 3432.6,2745.21 3435.57,2742.24 3435.57,2685.57 3435.57,2450.57 3380.57,2395.57 3380.57,2185.57 3455.57,2185.57 3515.57,2125.57 3515.57,2085.57 3515.57,2055.57
SW on Top Layer "SW_L01_P074" (solid, remove dead copper, pour order 74): 1380,2836.77 1520,2836.77 1520,2298.93 1547.92,2271.01 1568.99,2271.01 1590,2250 1590,2130 1466.91,2130 1380,2216.91
PVCC on Top Layer "PVCC_L01_P080" (solid, remove dead copper, pour order 80): 1820,2200 1850,2230 1850,2512 2398.52,2512 2398.52,2060 1820,2060 1810,2050 1770,2050 1770,2190 1780,2200
OUTPL on Top Layer "Top Layer-No Net 11" (solid, remove dead copper, pour order 26): 3965.46,1990.78 3640.78,1990.78 3640.57,1860.57 3580.57,1800.57 3580.57,1610.57 3590.57,1600.57 3625.57,1600.57 3625.57,1716.24 3714.69,1805.36 3845.14,1805.36 3965.57,1925.57
OUTNL on Top Layer "Top Layer-No Net 12" (solid, remove dead copper, pour order 28): 3695.75,1485.57 3705.57,1485.57 3785.57,1565.57 3790.57,1570.57 3845.57,1625.57 3845.57,1645.87 3890.56,1690.86 3890.56,1720.56 4015.57,1845.57 4015.57,1990.57 4335.57,1990.57 4335.57,1910.57 4335.57,1905.57 4280.57,1850.57 4110.57,1680.57 4065.57,1680.57 4015.57,1680.57 3914.48,1579.48 3843.93,1579.48 3820.57,1556.12 3820.57,1530.57 3820.57,1525.57 3762.87,1467.87 3680.63,1467.87 3680.63,1470.46
GND on Top Layer "GND_L01_P090" (solid, remove dead copper, pour order 90): 1850,3238.85 5100,3238.85 5100,2900 5400,2900 5400,400 5100,400 5100,51.51 1850,51.51
OUTPL on Top Layer "Top Layer-No Net 8" (solid, remove dead copper, pour order 46): 3678.57,1543.57 3678.48,1529.09 3678.48,1527.17 3595.88,1444.57 3593.57,1442.26 3593.57,1386.55 3582.82,1386.55 3580.13,1383.86 3580.51,1384.24 3580.51,1457.24 3580.51,1477.63 3646.98,1544.1 3646.98,1551.38 3648.13,1552.53 3657.09,1543.57
OUTL- on Top Layer "Top Layer-No Net 16" (solid, remove dead copper, pour order 36): 4015.57,2055.57 4015.57,2180.57 4080.57,2180.57 4400.57,2500.57 4411.51,2511.51 4411.51,2677.38 4411.51,2701.26 4517.74,2807.5 4530.92,2820.67 4633.09,2820.67 4712.36,2737.79 4712.36,2587.36 4645.57,2520.57 4500.57,2375.57 4500.57,2055.57
OUTL+ on Top Layer "Top Layer-No Net 15" (solid, remove dead copper, pour order 34): 3640.57,2055.57 3640.57,2185.57 3775.57,2185.57 3795.57,2205.57 3800.61,2211.01 3800.57,2305.57 3805.57,2310.57 3805.57,2390.57 3915.57,2500.57 3915.57,2635.57 3915.57,2710.84 3984.05,2779.31 3990.31,2785.57 4190.57,2785.57 4190.57,2550.57 3960.57,2320.57 3960.57,2125.57 3960.57,2055.57
"Vin_one cell" on Top Layer "VIN_ONE_CELL_L01_P096" (solid, remove dead copper, pour order 96): 60.04,689.72 233.78,689.73 340.06,583.45 364.85,558.66 364.85,481.38 59.86,481.38
GND on Top Layer "GND_L01_P110" (solid, remove dead copper, pour order 110): 1342.58,1897.07 1371.26,1897.07 1392.81,1875.51 1442.9,1875.51 1442.9,1814.86 1442.47,1814.43 1395.61,1814.43 1395.61,1818.16 1322.14,1891.63 1322.14,1896.76
NetL1_1 on Top Layer "NETL1_1_L01_P072" (solid, remove dead copper, pour order 72): 1200,2900 1200,2230 1170,2200 965.68,2200 965.68,2900
VIN on Top Layer "VIN_L01_P094" (solid, remove dead copper, pour order 94): 80.62,1219.53 190.95,1219.52 271.39,1139.08 390.5,1139.08 390.5,758.2 363.42,731.11 54.31,731.11 54.31,1193.21
5V on Top Layer "5V_L01_P106" (solid, remove dead copper, pour order 106): 540,1140 660,1140 660,636.16 653.84,630 574.24,630 574.24,663.67 599.76,689.18 599.76,1010.24 540,1070
VIN on Top Layer "VIN_L01_P070" (solid, remove dead copper, pour order 70): 100,2900 400,2900 786.13,2900 786.13,2210 100,2210
AGND on Top Layer "AGND_L01_P098" (solid, remove dead copper, pour order 98): 60,454.8 487.01,454.83 540.02,507.84 540.02,598.61 759.99,598.61 760.02,50 400,50 400,377.67 60,377.67
AGND on Top Layer "AGND_L01_P062" (solid, remove dead copper, pour order 62): 1200,1990.03 1135.15,2055.04 1084.94,2055.04 1079.95,2050.05 1080.51,2049.49 1080.51,1980.67 1051.89,1980.67 1040.85,1969.64 1040.85,1933.08 1077.04,1896.9 1077.04,1798.06 917.26,1798.06 917.26,2104.32 1194.65,2104.32 1194.97,2065.12 1288.09,1972 1288.09,1922.35 1220.42,1990.03
AGND on Signal Layer 1 "AGND_L02_P060" (solid, remove dead copper, pour order 60): 1000.32,2090.54 1020,2110.22 1350.01,2110.22 1476.24,1983.43 1476.24,1812.41 1413.91,1750.08 1050.26,1750.12 1000,1800.37 1000,2090 1020,2110
AGND on Signal Layer 1 "AGND_L02_P114" (solid, remove dead copper, pour order 114): 60,1580 480,1580 480,380 60,380
AGND on Signal Layer 1 "AGND_L02_P068" (solid, remove dead copper, pour order 68): 390,1691.34 810,2110 1276.98,2110 1277.39,2109.59 1489.9,2109.59 1591.91,2007.58 1591.91,50 390,50
GND on Signal Layer 1 "GND_L02_P100" (solid, remove dead copper, pour order 100): 72.47,1620 643.39,1620 643.39,2073.39 770,2200 1623.79,2200 1623.79,50 5100,50 5100,400 5400,400 5400,2900 5100,2900 5100,3200 400,3200 400,2900 72.47,2900
GND on Bottom Layer "GND_L04_P116" (solid, remove dead copper, pour order 116): 100,2800 500,2800 500,3200 5000,3200 5000,2800 5400,2800 5400,500 5000,500 5000,100 500,100 500,500 100,500
PVCC on Bottom Layer "PVCC_L04_P092" (solid, remove dead copper, pour order 92): 2184.33,2420 2534.44,2420 2833.1,2121.34 4476.15,2121.34 4605.52,1991.96 4605.52,1797.03 4554.03,1745.53 2654.96,1745.53 2129.01,2271.49 2129.01,2364.68 2167.89,2403.59
GND on Bottom Layer "GND_L04_P104" (solid, remove dead copper, pour order 104): 1590.26,2099.89 1749.74,2099.89 1749.74,2293.04 1739.85,2302.93 1739.85,2303.14 1657.37,2303.14 1657.16,2303.35 1590.24,2236.43 1590.24,2099.95
GND on Signal Layer 2 "GND_L03_P084" (solid, remove dead copper, pour order 84): 400,3200 5100,3200 5100,2900 5400,2900 5400,400 5100,400 5100,100 400,100 400,399.07 399.07,400 100,400 100,2900 400,2900

## Other copper
Top Layer:
  pour cut-out: 3475.65,1595.57 3515.57,1635.5 3515.57,1595.57
  pour cut-out: 2517.35,1861.19 2573.09,1861.19 3075.47,1358.81 3047.6,1330.94
  pour cut-out: 4418.69,2049.19 4507.06,2137.56 4507.06,2049.19
  pour cut-out: 3055.57,1352.38 3182.57,1352.57 3182.55,1335.67 3055.58,1335.66

## Silkscreen, mask and mechanical layers (free items; w line width, h text height)
Top Overlay:
  circle w15: c3314.77,1070.45 r7
  circle w15: c1153.13,590.01 r7
  text "OUTL-" at 4464.76,3040.16 h50
  text "OUTL+" at 3944.75,3037.75 h50
  text "OUTR+" at 2648.59,3034.19 h50
  text "OUTR-" at 3147.99,3034.19 h50
  text "TIDA-050024" at 1582.69,2960.43 h70
  text "VIN" at 133.42,2727.25 h50
  text "VOUT" at 2128.36,2448.03 h30
  text "GND" at 132.71,1714.73 h50
  text "OFF" at 346.95,1468.26 h40
  text "GND" at 2160,1450 h30
  text "EN" at 349.02,1371.61 h40
  text "PVCC" at 5047.76,1363.06 h30
  text "ON" at 349.71,1268.06 h40
  text "AVCC" at 5043.16,1259.89 h30
  text "AVCC_IN" at 5042.24,1153.03 h30
  text "OneCell" at 459.07,857.89 h35 r45
  text "Vin_Ctrl" at 334.07,855.9 h35 r45
  text "TwoCell" at 224.97,854.28 h35 r45
  text "LOW" at 2699.12,830.98 h30
  text "VIN" at 274.61,735.21 h35
  text "MOD" at 2699.75,730.94 h30
  text "5V_GEN" at 275.42,633.59 h35
  text "HIGH" at 2698.49,629.65 h30
  text "RI" at 2812.09,350.16 h50
  text "LI" at 3722.43,335.6 h50
  text "RIN" at 1158.06,43.63 h30
  text "LIN" at 1367.63,44.43 h30
  text "GND" at 1020.54,31.18 h30
  text "GND" at 1473.42,30.16 h30

## Text inside footprints (layer, text, board x,y; h text height)
C53: Top Overlay "+" at 2849.68,1859.53 h30 r180; Top (Mech5) "+" at 2849.68,1859.53 h30 r180
C54: Top Overlay "+" at 4330.31,1800.47 h30; Top (Mech5) "+" at 4330.31,1800.47 h30